# Altium PCB Pedal Board v0.1.PcbDoc
Units mm, origin at the board's own origin, x right, y up, seen from the top; angles counter-clockwise.
Board outline 38.5 x 20 mm, 2 copper layers (Top Layer, Bottom Layer); 29 components, 22 nets, 123 pads, 19 vias.
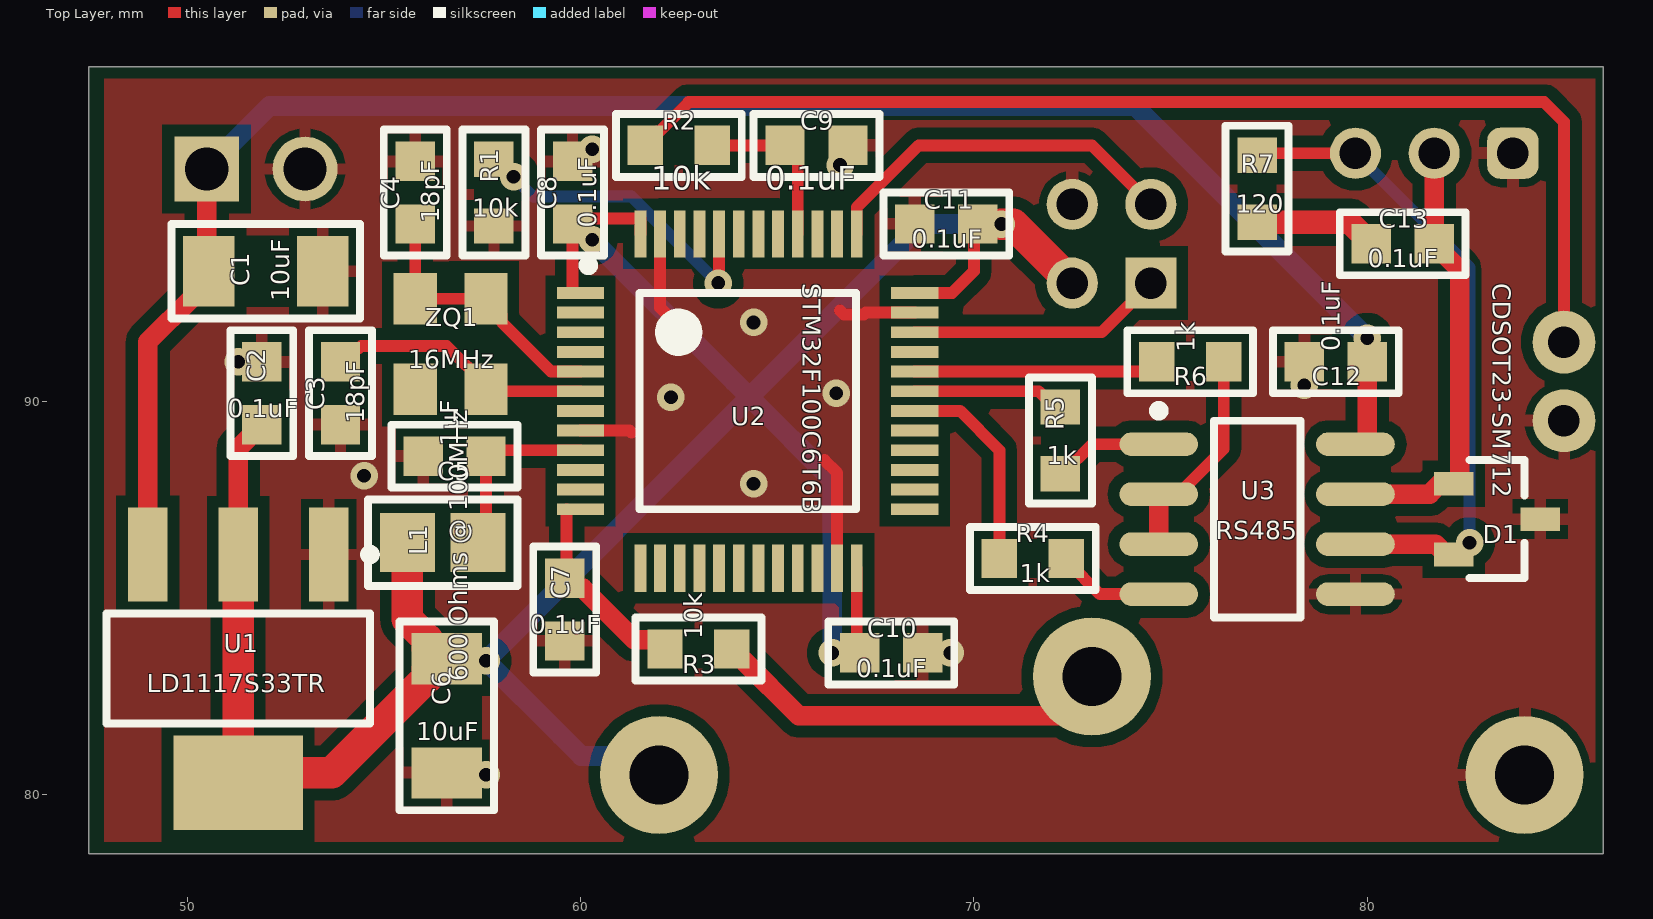
[diagram p0: Top Layer view]
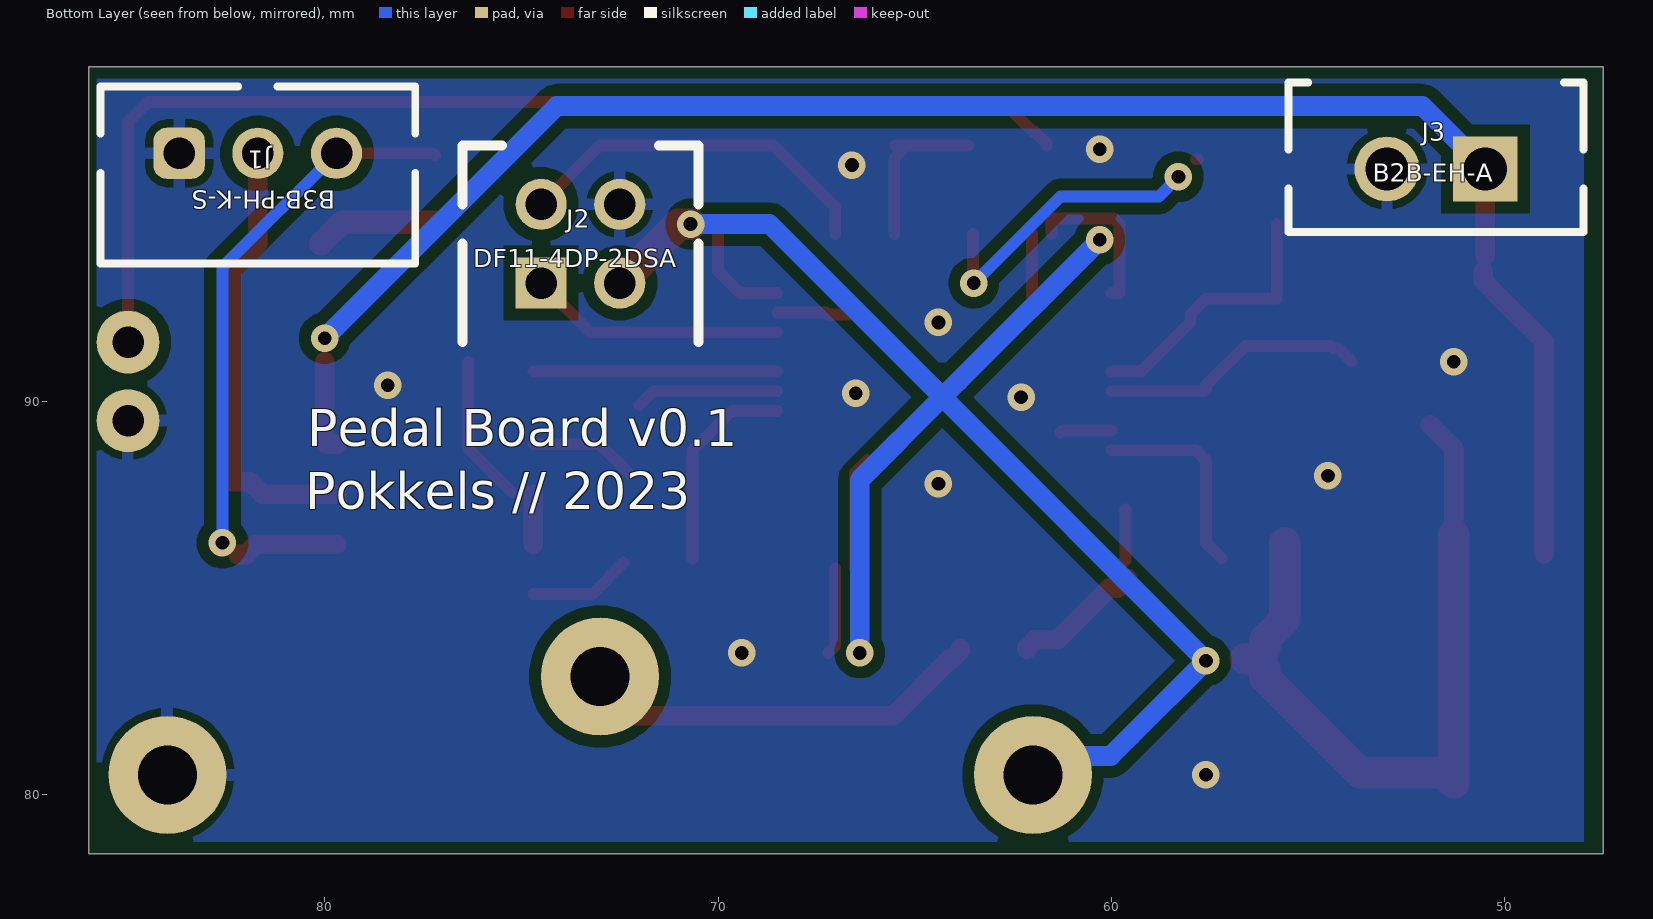
[diagram p1: Bottom Layer view, seen from below]
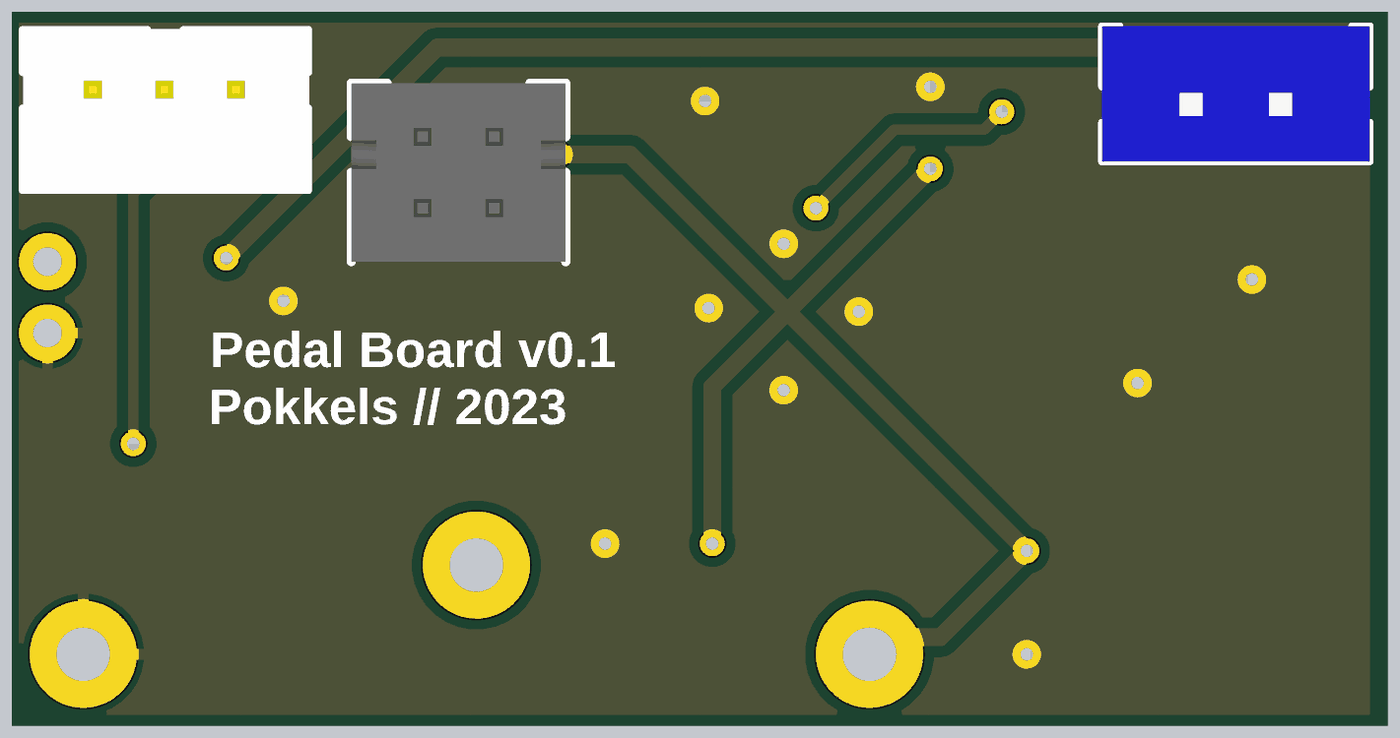
[diagram p2: 3D render of the assembled board from below, using the file's embedded part models]

## Layer stack, top to bottom
Top Solder: solder mask 0.0102, Solder Resist, Dk 3.5
Top Layer: signal copper 0.0356
Dielectric 1: dielectric 0.32, FR-4, Dk 4.8
Bottom Layer: signal copper 0.0356
Bottom Solder: solder mask 0.0102, Solder Resist, Dk 3.5

## Board outline
47.5,78.5 47.5,98.5 86,98.5 86,78.5

## Design rules (kind name [scope] priority, off if disabled: settings)
Clearance Clearance_1 [InPolygon] p1: gap=0.3 ignorepadtopadclearanceinfootprint=FALSE except(0: Arc-Hole Track-Hole SMDPad-Hole THPad-Hole Via-Hole Fill-Hole Poly-Hole Region-Hole Text-Hole)
Clearance [All] p2: gap=0.2 ignorepadtopadclearanceinfootprint=FALSE except(0: Arc-Hole Track-Hole SMDPad-Hole THPad-Hole Via-Hole Fill-Hole Poly-Hole Region-Hole Text-Hole)
DiffPairsRouting [InDifferentialPair('USB_O')] p1: maxlimit=0.152 minlimit=0.152 mostfreqgap=0.152 toplayer_minwidth=0.305 toplayer_maxwidth=1.524 toplayer_prefwidth=0.305 bottomlayer_minwidth=0.305 bottomlayer_maxwidth=1.524 bottomlayer_prefwidth=0.305 maxuncoupledlength=50
HoleSize [All] p1: absolutevalues=TRUE maxlimit=10.2 minlimit=0.3 maxpercent=80.000 minpercent=20.000
HoleToHoleClearance [All] p1: gap=0.3 allowstackedmicrovias=TRUE
MinimumAnnularRing [All] p1: minimumring=0.15
MinimumSolderMaskSliver [All] p1: minsoldermaskwidth=0.05
PlaneClearance [All] p1: clearance=0.3
PlaneConnect PlaneConnect_Via [Isvia] p1: planeconnectstyle=Direct reliefexpansion=0.508 reliefentries=4 reliefconductorwidth=0.254 reliefairgap=0.254
PlaneConnect [All] p2: planeconnectstyle=Relief reliefexpansion=0.4 reliefentries=4 reliefconductorwidth=0.5 reliefairgap=0.3
PolygonConnect PolygonConnectMH [InPadClass('MH')] p1: connectstyle=Direct reliefconductorwidth=0.254 reliefentries=4 polygonreliefangle="90 Angle" airgapwidth=0.254
PolygonConnect PolygonConnectVia [Isvia] p2: connectstyle=Direct reliefconductorwidth=0.254 reliefentries=4 polygonreliefangle="90 Angle" airgapwidth=0.254
PolygonConnect PowerConnect_IsStitching [IsStitchingVia] p3: connectstyle=Relief reliefconductorwidth=0.3 reliefentries=4 polygonreliefangle="45 Angle" airgapwidth=0.2
PolygonConnect PowerConnect [(InNet('+VIN') AND InNet('-VIN'))] p4: connectstyle=Relief reliefconductorwidth=0.5 reliefentries=4 polygonreliefangle="45 Angle" airgapwidth=0.2
PolygonConnect PolygonConnect_STM32 [InComponent('U4')] p5: connectstyle=Direct reliefconductorwidth=0.3 reliefentries=4 polygonreliefangle="90 Angle" airgapwidth=0.2
PolygonConnect [All] p6: connectstyle=Relief reliefconductorwidth=0.3 reliefentries=4 polygonreliefangle="90 Angle" airgapwidth=0.2
RoutingVias [All] p1: holewidth=0.3 width=0.6 viastyle="Through Hole" minholewidth=0.3 minwidth=0.6 maxholewidth=10 maxwidth=15
SilkToSilkClearance [All] p1: silktosilkclearance=0.2
SilkToSolderMaskClearance [IsPad] p1: minsilkscreentomaskgap=0.05 clearancetoexposedcopper=TRUE
SolderMaskExpansion [All] p1: expansion=0.05 istentingtop=FALSE
Width [All] p1: maxlimit=1 minlimit=0.25 preferedwidth=0.3 minimp=50.000000 maximp=50.000000 favimp=50.000000 checkconnectedcopper=TRUE
22 further rules are at their usual default settings.

## Components (designator, comment, footprint, x,y, rotation, side; value= is the part's Value field where it differs from the comment)
C1 "10uF" CAPC3216N 52,93.3 r180 top value=22uF (schematic designator C4)
C2 "0.1uF" CAPC1608N 51.9,90.2 r90 top value=100pF
C3 "18pF" CAPC1608N 53.9,90.2 r90 top value=100pF (schematic designator C13)
C4 "18pF" CAPC1608N 55.8,95.3 r270 top value=100pF (schematic designator C12)
C5 "1uF" CAPC1608N 56.8,88.6 r0 top value=100pF (schematic designator C17)
C6 "10uF" CAPC3216N 56.6,82 r90 top value=22uF (schematic designator C7)
C7 "0.1uF" CAPC1608N 59.6,84.7 r90 top value=100pF (schematic designator C9)
C8 "0.1uF" CAPC1608N 59.8,95.3 r270 top value=100pF (schematic designator C23)
C9 "0.1uF" CAPC1608N 66,96.5 r180 top value=100pF (schematic designator C1)
C10 "0.1uF" CAPC1608N 67.9,83.6 r180 top value=100pF (schematic designator C22)
C11 "0.1uF" CAPC1608N 69.3,94.5 r0 top value=100pF (schematic designator C24)
C12 "0.1uF" CAPC1608N 79.2,91 r180 top value=100pF (schematic designator C50)
C13 "0.1uF" CAPC1608N 80.9,94 r180 top value=100pF (schematic designator C51)
D1 "CDSOT23-SM712" SOT23-3N 83.3,87 r0 top (schematic designator D50)
J1 "B3B-PH-K-S" B3B-PH-K-S 80.7,96.3 r0 bottom (schematic designator J12)
J2 "DF11-4DP-2DSA" DF11-4DP-2DSA 73.5,94 r180 bottom (schematic designator J1)
J3 "B2B-EH-A" B2B-EH-A 50.5,95.9 r0 bottom (schematic designator J2)
L1 "600 Ohms @ 100MHz" INDC2012N 56.5,86.4 r0 top (schematic designator L2)
R1 "10k" RESC1608N 57.8,95.3 r90 top value=33 (schematic designator R22)
R2 "10k" RESC1608N 62.5,96.5 r180 top value=33 (schematic designator R1)
R3 "10k" RESC1608N 63,83.7 r0 top value=33 (schematic designator R10)
R4 "1k" RESC1608N 71.5,86 r0 top value=33 (schematic designator R52)
R5 "1k" RESC1608N 72.2,89 r270 top value=33 (schematic designator R50)
R6 "1k" RESC1608N 75.5,91 r0 top value=33 (schematic designator R51)
R7 "120" RESC1608N 77.2,95.4 r90 top value=33 (schematic designator R53)
U1 "LD1117S33TR" SOT223-4N 51.3,83.2 r270 top (schematic designator U2)
U2 "STM32F100C6T6B" STM-LQFP48_N 64.25,90 r0 top (schematic designator U4)
U3 "RS485" SOIC127P600-8AN 77.2,87 r0 top (schematic designator U10)
ZQ1 "16MHz" q3225 57.6,92.6 r270 top

## Footprints (in the part's own frame and the unit in brackets; to place one, negate y for a bottom-side part, rotate by r counter-clockwise, add the part's x,y. Pads: shape width x height; smd on the part's side, far side on the other; paste and mask are expansions set on the pad)
B2B-EH-A [mm]
  rect 1.65x1.65 / inner round 1.65 / far side rect 1.65x1.65 hole 1.1: 1(0,0)
  round 1.65 hole 1.1: 2(2.5,0)
  silkscreen extent -2.5,-2.2 5,1.6, body extent -2.5,-2.2 5,1.6, height 6
B3B-PH-K-S [mm] "JST B3B-PH-K-S"
  rrect50% 1.3x1.3 hole 0.8: 1(3,0)
  round 1.3 hole 0.8: 2(1,0) 3(-1,0)
  silkscreen extent -3,-1.7 5,2.8, body extent -3.02,-1.72 4.98,2.78, height 6
CAPC1608N [mm] "Chip Capacitor, Body 1.6x0.8mm, IPC Medium Density"
  rect 1x1 smd: 1(-0.8,0) 2(0.8,0)
  Top Layer pour cut-out: -0.3,0.5 0.3,0.5 0.3,-0.5 -0.3,-0.5
  silkscreen extent -1.6,-0.8 1.6,0.8, body extent -0.87,-0.48 0.87,0.48, height 0.85
CAPC3216N [mm] "Chip Capacitor, Body 3.2x1.6mm, IPC Medium Density"
  rect 1.3x1.8 smd: 1(-1.45,0) 2(1.45,0)
  Top Layer pour cut-out: -0.8,0.9 0.8,0.9 0.8,-0.9 -0.8,-0.9
  silkscreen extent -2.4,-1.2 2.4,1.2, body extent -1.7,-0.9 1.7,0.9, height 1.35
DF11-4DP-2DSA [mm]
  rect 1.3x1.3 hole 0.8: 1(-1,-1)
  round 1.3 hole 0.8: 2(-1,1) 3(1,-1) 4(1,1)
  silkscreen extent -3,-2.5 3,2.5, body extent -3,-2.5 3,2.5, height 6.5
INDC2012N [mm] "Chip Inductor, Body 2.0x1.2mm, IPC Medium Density"
  rect 1.4x1.5 smd: 1(-0.9,0) 2(0.9,0)
  silkscreen extent -1.9,-1.1 1.9,1.1, body extent -1,-0.6 1,0.6, height 1.05
q3225 [mm]
  rect 1.3x1.1 smd: 0(0,0) 1(2.3,0) 2(2.3,-1.8) 3(0,-1.8)
RESC1608N [mm] "Chip Resistor, Body 1.6x0.8mm, IPC Medium Density"
  rect 0.9x1 smd: 1(-0.85,0) 2(0.85,0)
  Top Layer pour cut-out: -0.4,0.5 0.4,0.5 0.4,-0.5 -0.4,-0.5
  silkscreen extent -1.6,-0.8 1.6,0.8, body extent -0.85,-0.48 0.85,0.48, height 0.6
SOIC127P600-8AN [mm] "SOIC, 8-Leads, Body 4.9x3.9mm, Pitch 1.27mm, IPC Medium Density"
  oval 2x0.6 smd: 1(-2.5,1.905) 2(-2.5,0.635) 3(-2.5,-0.635) 4(-2.5,-1.905) 5(2.5,-1.905) 6(2.5,-0.635) 7(2.5,0.635) 8(2.5,1.905)
  silkscreen extent -2.62,-2.5 1.1,2.88, body extent -2,-2.5 2,2.5, height 2.72
SOT23-3N [mm] "SOT23, 3-Leads, Body 2.9x1.3mm, Pitch 0.95mm, Lead Span 2.5mm, IPC Medium Density"
  rect 1x0.6 smd: 1(-1.1,0.9) 2(-1.1,-0.9) 3(1.1,0)
  silkscreen extent -0.7,-1.5 0.7,1.5, body extent -0.7,-1.5 0.7,1.5, height 1.1
SOT223-4N [mm] "SOT223, 4-Leads, Body 6.5x3.5mm, Pitch 2.3mm, Lead Span 7mm, IPC Medium Density"
  rect 2.4x1 smd: 1(-2.9,2.3) 2(-2.9,0) 3(-2.9,-2.3)
  rect 2.4x3.3 smd: 4(2.9,0)
  silkscreen extent -3.02,-3.35 1.4,3.48, body extent -3.37,-3.25 3.63,3.25, height 1.64
STM-LQFP48_N [mm] "QFP, 48-Leads, Body 7x7mm, Pitch 0.5mm, IPC Medium Density"
  rect 1.2x0.3 smd: 1(-4.25,2.75) 2(-4.25,2.25) 3(-4.25,1.75) 4(-4.25,1.25) 5(-4.25,0.75) 6(-4.25,0.25) 7(-4.25,-0.25) 8(-4.25,-0.75) 9(-4.25,-1.25) 10(-4.25,-1.75) 11(-4.25,-2.25) 12(-4.25,-2.75) 25(4.25,-2.75) 26(4.25,-2.25) 27(4.25,-1.75) 28(4.25,-1.25) 29(4.25,-0.75) 30(4.25,-0.25) 31(4.25,0.25) 32(4.25,0.75) 33(4.25,1.25) 34(4.25,1.75) 35(4.25,2.25) 36(4.25,2.75)
  rect 0.3x1.2 smd: 13(-2.725,-4.25) 14(-2.225,-4.25) 15(-1.725,-4.25) 16(-1.225,-4.25) 17(-0.725,-4.25) 18(-0.225,-4.25) 19(0.275,-4.25) 20(0.775,-4.25) 21(1.275,-4.25) 22(1.775,-4.25) 23(2.275,-4.25) 24(2.775,-4.25) 37(2.775,4.25) 38(2.275,4.25) 39(1.775,4.25) 40(1.275,4.25) 41(0.775,4.25) 42(0.275,4.25) 43(-0.225,4.25) 44(-0.725,4.25) 45(-1.225,4.25) 46(-1.725,4.25) 47(-2.225,4.25) 48(-2.725,4.25)
  silkscreen extent -4.17,-2.75 2.75,3.57, body extent -3.5,-3.5 3.5,3.5, height 1.6

## Part data
C1 C6: library part "Cap 3216 (1206)", "Capacitor"
C2 C3 C4 C5 C7 C8 C9 C10 C11 C12 C13: library part "Cap 1608 (0603)", "Capacitor"
D1: "TVS DIODE 7V/12V 14V/26V SOT23-3"
J1: "B3B-PH-K-S (JST 2mm)"
J3: "B2B-EH-A (JST 2.54mm)"
L1: library part BLM21A, "Chip Ferrite Bead BLM21A"
R1 R2 R3 R4 R5 R6 R7: library part "Res 1608 (0603)", "Resistor 1608 (0603)"
U1: library part LM1117MPX-ADJ, "Single Output LDO, 800 mA, Adjustable 1.5 to 13.5 V Output, 3.8 to 15 V Input, with Internal Current Limiting, 4-pin SOT-223 (DCY), -40 to 125 degC, Green (RoHS & no Sb/Br)", Manufacturer="Texas Instruments", PartNumber=REG1117, Rating=Catalog, Supplier Part Number 1=REG1117-ND, Code_JEDEC=TO-261, ComponentLink1Description="Manufacturer URL", ComponentLink1URL=http://www.ti.com/, ComponentLink2Description=Datasheet, ComponentLink2URL=http://www.ti.com/general/docs/lit/getliterature.tsp?genericPartNumber=REG1117&fileType=pdf, ComponentLink3Description="Package Specification", ComponentLink3URL=http://www.ti.com/litv/pdf/mpds094a, DatasheetVersion=SBVS001D, Eco-Plan="Green (RoHS & no Sb/Br)", Iout(Max)(A)=0.8, Iq(Typ)(mA)=4, Mounting Technology="Surface Mount", PackageDescription="4-Pin Plastic Small Outline, Body 3.5 x 6.5 mm, Pitch 2.3 mm", PackageReference=DCY4, PackageVersion=4202506/B, SubFamily="Single Channel LDO", Supplier 1=Digi-Key, Supplier 2=Farnell, Supplier 3=Newark, Supplier 4=Mouser, Supplier Part Number 2=1097566, Supplier Part Number 3=14P6981, Supplier Part Number 4=595-REG1117, Vdo(Typ)(mV)=1100, Vin(Max)(V)=15, Vin(Min)(V)=3.8, Vout Adj(Max)(V)=13.5, Vout Adj(Min)(V)=1.25
U2: "ARM Cortex-M3 32-bit MCU, 32 KB Flash, 4 KB Internal RAM, 37 I/Os, 48-pin LQFP, -40 to 85 degC, Tray", I/Os (High Current)=37, Operating Frequency(F) (Processor speed) (MHz)=24, Supplier Part Number 1=497-10500-ND, Supply Voltage(Vcc) min (V)=2, A/D Converter="1x12-bit (10 Channel)", ComponentLink1Description="Manufacturer URL", ComponentLink1URL=http://www.st.com/web/en/home.html, ComponentLink2Description=Datasheet, ComponentLink2URL=http://www.st.com/st-web-ui/static/active/en/resource/technical/document/datasheet/CD00251732.pdf, ComponentLink3Description="Package Specification", ComponentLink3URL=http://www.st.com/st-web-ui/static/active/en/resource/technical/document/datasheet/DM00058181.pdf, Core="ARM Cortex-M3", D/A Converter="2x12-bit (2 Channel)", DatasheetVersion="Rev. 7", FLASH Size (Prog) (kB)=32, Internal RAM Size (kB)=4, Mounting Technology="Surface Mount", PackageDescription="48-Pin Low Profile Quad Flat Package, 7 x 7 mm Body, 0.5 mm Pitch", PackageReference=LQFP48, PackageVersion="Rev. 6, 06/2013", Packing=Tray, PartNumber=STM32F100C6T6B, Supplier 1=Digi-Key, Supplier 2=Farnell, Supplier 3=Newark, Supplier 4=Newark, Supplier 5=Mouser, Supplier Part Number 2=1838510, Supplier Part Number 3=86R1310, Supplier Part Number 4=76R0987, Supplier Part Number 5=511-STM32F100C6T6B
U3: library part SN65HVD22D, "Extended Common-mode RS-485 Transceiver, 0.5 Mbps, 5 V, Half Duplex, -40 to 85 degC, 8-pin SOIC, Pb-Free (RoHS)", Manufacturer="Texas Instruments", PartNumber=SN65HVD22P
ZQ1: library part NX3225-4

## Free pads (board coordinates)
  round 3 hole 1.5: 7(73,83) 7(84,80.5) ""(62,80.5)
  round 1.6 hole 0.8: 8(85,89.5) 9(85,91.5)

## Via types
v1: diameter 0.7, hole 0.35, Top Layer to Bottom Layer, 19 vias

## Nets (pads, with @x,y where several pads share a name; then routed paths per layer and width w, separated by ;. In a path a pad name is that pad's centre, name@x,y a point inside that pad or via, vN(x,y) a via of type N, cw(c..) or ccw(c..) an arc to the next point about the centre after c; other vN are vias at no path point)
3.3V: C2.1 C6.2 C8.2 C10.2 C11.2 J2.3 L1.1 pad. U1.2 U1.4 U2.1 U2.24 U2.36 U2.48 | length 67.9
  Top Layer w0.3: U2.1 59.8,92.75 C8.2 59.943,94.643 61.525,94.643 U2.48 ; U2.24 67.025,83.776 C10.2@67.201,83.6 ; U2.36 69.45,92.75 70,93.3 70,94.4 C11.2
  Top Layer w0.5: U1.2@51.3,86.6 51.3,88.8 C2.1
  Top Layer w0.8: U1.2@51.3,86.6 U1.2 U1.4 51.55,80.55 53.681,80.55 56.1,82.969 56.1,83.2 C6.2@56.35,83.45 ; L1.1 55.6,84.45 56.1,83.95 56.1,83.7 C6.2@56.35,83.45 ; C6.2 C6.2@56.35,83.45 ; v1(70.7,94.5) 71,94.5 J2.3
  Bottom Layer w0.5: v1(60.3,94.1) 63.9,90.5 64.3,90.1 ; pad.@61.5,80.5 pad. 61.522,80.978 60.022,80.978 59.5,81.5 v1(57.6,83.4) 64.3,90.1 ; v1(66.4,83.6) 66.4,88 64.3,90.1 ; v1(70.7,94.5) 68.7,94.5 64.3,90.1
5V: C1.2 C12.1 J3.1 U1.3 U3.8 | length 44.9
  Top Layer w0.5: U1.3@49,86.124 49,91.5 50.15,92.65 50.55,93.05 C1.2 ; C1.2@50.5,93.7 J3.1 J3.1@50.5,96.2 ; U3.8 79.954,88.905 80,88.951 C12.1
  Bottom Layer w0.5: J3.1@50.8,96.2 52.1,97.5 74.1,97.5 v1(80,91.6)
ADC_POW: C7.2 R3.1 U2.12 | length 4.7
  Top Layer w0.3: U2.12@59.65,87.25 59.647,87.25 59.647,85.953 C7.2@59.7,85.9
  Top Layer w0.5: C7.2 59.85,85.25 60.05,85.25 61.37,83.93 61.95,83.93 62.15,83.73 R3.1
Button1: C9.2 R2.1 U2.40 | length 4.2
  Top Layer w0.3: R2.1@63.65,96.5 C9.2 ; C9.2@65.5,96.5 C9.2 ; U2.40 65.525,96.175 C9.2
GND: C1.1 C2.2 C3.1 C4.1 C5.1 C6.1 C7.1 C8.1 C9.1 C10.1 C11.1 C12.2 D1.3 J1.1 J2.4 J3.2 pad.7@84,80.5 pad.8 R1.1 U1.1 U2.8 U2.23 U2.35 U2.47 U3.5 | length 8.4
  Top Layer w0.3: U2.8 61.25,89.25 61.3,89.2 ; U2.47 62.025,92.375 62.3,92.1 ; 66.2,88.5 66.525,88.175 U2.23 ; 66.6,92.3 66.7,92.2 67.2,92.2 67.25,92.25 U2.35
  other v1: 57.6,80.5 69.4,83.6 64.4,87.9 54.5,88.1 62.3,90.1 66.5,90.2 78.4,90.4 51.3,91 64.4,92 66.6,96 60.3,96.4
NetC3_2: C3.2 U2.6 ZQ1.1 | length 6.8
  Top Layer w0.3: C3.2 54.25,91.35 54.376,91.35 54.426,91.4 56.6,91.4 57.6,90.4 ZQ1.1 57.65,90.25 U2.6
NetC4_2: C4.2 U2.5 ZQ1.0 ZQ1.3 | length 7
  Top Layer w0.3: C4.2 ZQ1.3 ZQ1.0 58,92.2 58,92.005 59.255,90.75 U2.5
NetC5_2: C5.2 L1.2 U2.9 | length 5.2
  Top Layer w0.3: L1.2@57.2,86 57.6,86.4 57.6,88.5 57.85,88.75 U2.9
NetC13_1: C13.1 D1.1 J1.2 U3.7 | length 11.4
  Top Layer w0.5: U3.7 81.585,87.635 81.9,87.95 82.35,87.95 82.35,93.35 C13.1 J1.2
NetC13_2: C13.2 R7.1 | length 3.1
  Top Layer w0.6: R7.1 79.55,94.55 C13.2
NetD1_2: D1.2 J1.3 R7.2 U3.6 | length 16.2
  Top Layer w0.3: R7.2 77.25,96.3 J1.3
  Top Layer w0.5: U3.6 81.735,86.365 82,86.1 D1.2
  Bottom Layer w0.3: J1.3 82.6,93.4 v1(82.6,86.4)
NetR1_2: R1.2 U2.44 | length 7.6
  Top Layer w0.3: R1.2 R1.2@57.85,96.15 ; v1(63.5,93) 63.525,93.025 U2.44
  Bottom Layer w0.3: v1(58.3,95.7) 58.8,95.2 61.3,95.2 v1(63.5,93)
NetR2_2: pad.9 R2.2 | length 29.6
  Top Layer w0.3: R2.2 61.65,96.55 61.95,96.85 62,96.85 62.75,97.6 84.5,97.6 85,97.1 pad.9
NetR3_2: pad.7@73,83 R3.2 | length 12.3
  Top Layer w0.5: R3.2 63.85,83.65 64.05,83.45 64.1,83.45 65.55,82 pad.7@73,82 ; pad.7@71.989,82.532 72.532,82.532 pad.7@73,83 ; pad.7@72.565,82.5 pad.7@73.75,82.5
NetR4_2: R4.2 U3.4 | length 2.6
  Top Layer w0.3: R4.2@72.4,85.9 73.205,85.095 U3.4
NetR5_2: R5.2 U3.1 | length 2.8
  Top Layer w0.3: R5.2@72.25,88.15 73.005,88.905 U3.1
NetR6_2: R6.2 U3.2 U3.3 | length 5.1
  Top Layer w0.3: U3.2@75.233,87.668 76.35,88.785 R6.2
  Top Layer w0.5: U3.3 U3.2
SWCLK: J2.2 U2.37 | length 9.4
  Top Layer w0.3: U2.37 67.025,94.925 68.6,96.5 73,96.5 J2.2
SWDIO: J2.1 U2.34 | length 6.5
  Top Layer w0.3: U2.34 73.25,91.75 J2.1
UART_RTS: R6.1 U2.32 | length 6.2
  Top Layer w0.3: U2.32 R6.1@74.7,90.75
UART_RX: R5.1 U2.31 | length 3.6
  Top Layer w0.3: U2.31 71.65,90.25 R5.1@72,89.9
UART_TX: R4.1 U2.30 | length 5.3
  Top Layer w0.3: U2.30 69.65,89.75 70.65,88.75 R4.1
pads on no net: U2.2 U2.3 U2.4 U2.7 U2.10 U2.11 U2.13 U2.14 U2.15 U2.16 U2.17 U2.18 U2.19 U2.20 U2.21 U2.22 U2.25 U2.26 U2.27 U2.28 U2.29 U2.33 U2.38 U2.39 U2.41 U2.42 U2.43 U2.45 U2.46 ZQ1.2

## Polygon pours and split planes (outlines as drawn)
GND on Bottom Layer "GND_L02_P008" (solid, pour order 8): 85.8,98.2 48,98.2 48,78.8 85.8,78.8
GND on Top Layer "GND_L01_P006" (solid, pour order 6): 47.9,98.2 47.9,78.8 85.8,78.8 85.8,98.2

## Silkscreen, mask and mechanical layers (free items; w line width, h text height)
Bottom Overlay:
  text "Pedal Board v0.1" at 80.45,88.55 h1.6
  text "Pokkels // 2023" at 80.5,86.95 h1.6
Mechanical 4:
  the board outline again, w0.3